# Altium PCB Bottom+Board_V1.pcbdoc
Units mm, origin at the board's own origin, x right, y up, seen from the top; angles counter-clockwise.
Board outline 91.9 x 71.4 mm, 2 copper layers (Top Layer, Bottom Layer); 9 components, 12 nets, 44 pads, 0 vias.
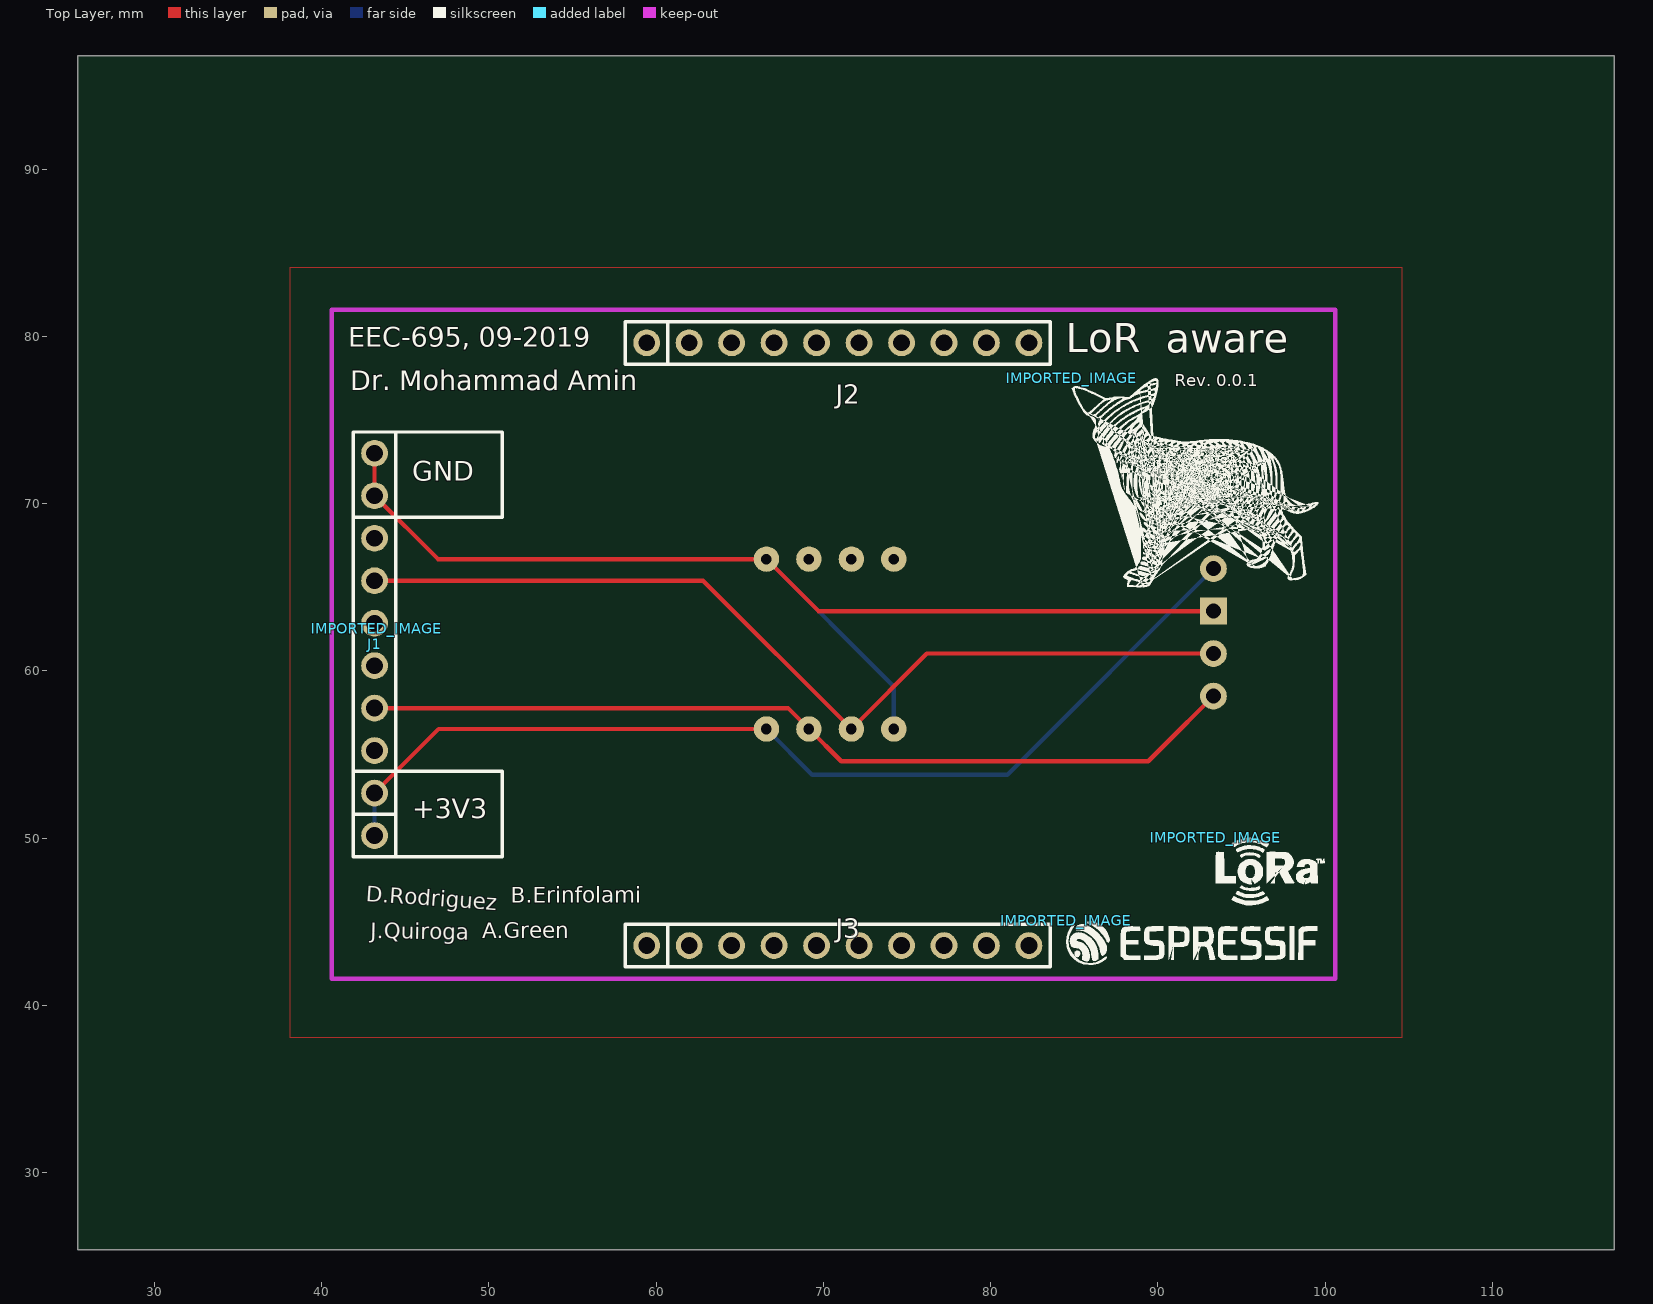
[diagram p0: Top Layer view]
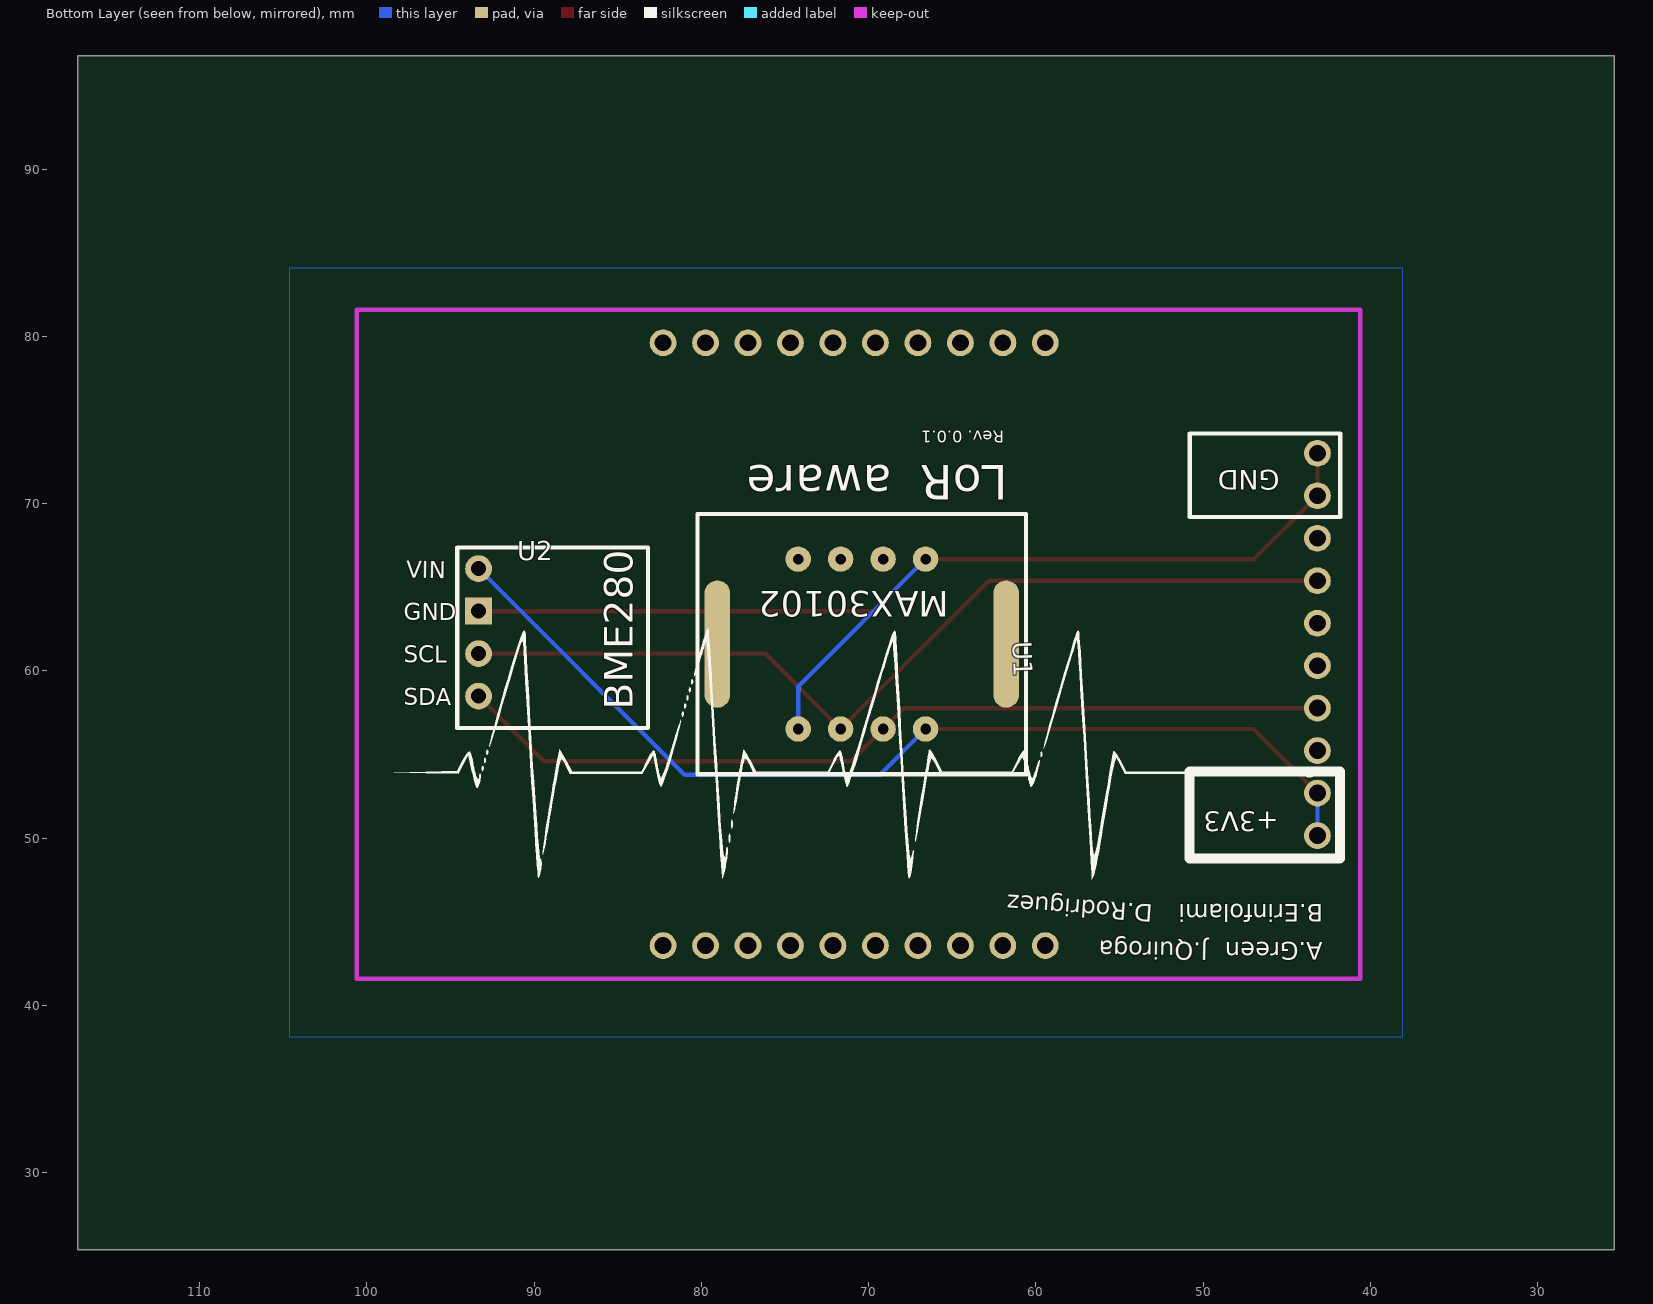
[diagram p1: Bottom Layer view, seen from below]

## Layer stack, top to bottom
Top Layer: signal copper (thickness not stored)
Dielectric: dielectric 0.32, FR-4, Dk 4.8
Bottom Layer: signal copper (thickness not stored)

## Board outline
117.3,25.4 25.4,25.4 25.4,96.8 117.3,96.8

## Components (designator, comment, footprint, x,y, rotation, side; value= is the part's Value field where it differs from the comment)
IMPORTED_IMAGE "IMPORTED_IMAGE" IMPORTED_IMAGE 43.297,62.527 r0 top
IMPORTED_IMAGE "IMPORTED_IMAGE" IMPORTED_IMAGE 84.86,77.503 r0 top
IMPORTED_IMAGE "IMPORTED_IMAGE" IMPORTED_IMAGE 84.515,45.051 r0 top
IMPORTED_IMAGE "IMPORTED_IMAGE" IMPORTED_IMAGE 93.468,50.019 r0 top
J1 "Header-Female-2.54_1x10" HDR-TH_10PIN-V-FEMALE-PITCH2.54 43.16,61.59 r90 top
J2 "Header-Female-2.54_1x10" HDR-TH_10PIN-V-FEMALE-PITCH2.54 70.86,79.62 r0 top
J3 "Header-Female-2.54_1x10" HDR-TH_10PIN-V-FEMALE-PITCH2.54 70.86,43.58 r0 top
U1 "MAX30102BREAKOUT" "MAX30102PCB COPY" 60.592,69.39 r90 bottom
U2 "BME280" BME280 94.592,67.39 r0 bottom

## Footprints (in the part's own frame and the unit in brackets; to place one, negate y for a bottom-side part, rotate by r counter-clockwise, add the part's x,y. Pads: shape width x height; smd on the part's side, far side on the other; paste and mask are expansions set on the pad)
BME280 [mm]
  round 1.6 hole 0.9: 1(-1.27,1.27) 3(-1.27,6.35) 4(-1.27,8.89)
  rect 1.6x1.6 hole 0.9: 2(-1.27,3.81)
  silkscreen extent -11.4,0 0,10.8
HDR-TH_10PIN-V-FEMALE-PITCH2.54 [mm]
  round 1.6 hole 1: 1(-11.43,0) 2(-8.89,0) 3(-6.35,0) 4(-3.81,0) 5(-1.27,0) 6(1.27,0) 7(3.81,0) 8(6.35,0) 9(8.89,0) 10(11.43,0)
  silkscreen extent -12.7,-1.27 12.7,1.27
IMPORTED_IMAGE [mm]
"MAX30102PCB COPY" [mil]
  round 60 hole 25: 1(-106.3,236.21) 2(-106.3,336.21) 3(-106.3,436.21) 4(-106.3,536.21) 5(-506.3,536.21) 6(-506.3,436.21) 7(-506.3,336.21) 8(-506.3,236.21)
  oval 300x60 smd: ""(-306.3,46.45) ""(-306.3,726.38)
  silkscreen extent -613,0 0,773

## Nets (pads, with @x,y where several pads share a name; then routed paths per layer and width w, separated by ;. In a path a pad name is that pad's centre, name@x,y a point inside that pad or via, vN(x,y) a via of type N, cw(c..) or ccw(c..) an arc to the next point about the centre after c; other vN are vias at no path point)
GND: J1.9 J1.10 U1.1 U1.5 U2.2 | length 68.9
  Top Layer w0.26: J1.10 J1.9 46.95,66.69 U1.1 69.703,63.581 U2.2
  Bottom Layer w0.26: U1.1 74.212,59.07 U1.5
S$37: 
S$320: 
S$1058: 
S$1060: 
S$1126: 
S$1129: 
S$1132: 
S$1134: 
SCL: J1.7 U1.6 U2.3 | length 55.7
  Top Layer w0.26: J1.7 62.802,65.4 U1.6 76.183,61.041 U2.3
SDA: J1.4 U1.7 U2.4 | length 53.1
  Top Layer w0.26: J1.4 67.882,57.78 U1.7 71.062,54.6 89.421,54.6 90.295,55.474 U2.4
VCC: J1.1 J1.2 U1.8 U2.1 | length 60.5
  Top Layer w0.26: J1.2 46.991,56.53 U1.8
  Bottom Layer w0.26: J1.1 J1.2 ; U1.8 69.322,53.8 81.001,53.8 U2.1
pads on no net: J1.3 J1.5 J1.6 J1.8 J2.1 J2.2 J2.3 J2.4 J2.5 J2.6 J2.7 J2.8 J2.9 J2.10 J3.1 J3.2 J3.3 J3.4 J3.5 J3.6 J3.7 J3.8 J3.9 J3.10 U1. U1.2 U1.3 U1.4

## Polygon pours and split planes (outlines as drawn)
GND on Bottom Layer (solid): 38.1,84.1 38.1,38.1 104.6,38.1 104.6,84.1 38.1,84.1
GND on Top Layer (solid): 38.1,84.1 38.1,38.1 104.6,38.1 104.6,84.1 38.1,84.1

## Silkscreen, mask and mechanical layers (free items; w line width, h text height)
Top Overlay:
  lines w0.203 net S$1126: 41.89,48.89 50.8,48.89 50.8,54 41.89,54
  lines w0.203 net S$1129: 41.89,69.2 50.8,69.2 50.8,74.29 41.89,74.29
  text "EEC-695, 09-2019" at 41.6,79 h2
  text "LoR" at 84.5,78.46 h3
  text "aware" at 90.46,78.44 h3
  text "Rev. 0.0.1" at 91,76.8 h1.25
  text "Dr. Mohammad Amin" at 41.7,76.4 h2
  text "GND" at 45.4,71 h2.03
  text "+3V3" at 45.4,50.8 h2.03
  text "D.Rodriguez" at 42.6,45.9 h1.6 r356
  text "B.Erinfolami" at 51.3,45.8 h1.6
  text "J.Quiroga" at 42.9,43.7 h1.6 r359
  text "A.Green" at 49.6,43.7 h1.6
Bottom Overlay:
  lines w0.254 net S$1132: 41.8,69.2 50.8,69.2 50.8,74.2 41.8,74.2 41.8,69.2
  lines w0.6 net S$1134: 41.8,48.8 41.8,54 50.8,54 50.8,48.8 41.8,48.8
  text "Rev. 0.0.1" at 61.88,74.6 h1.25 r180
  text "LoR" at 61.664,73.002 h3.5 r180
  text "aware" at 68.6,73 h3.5 r180
  text "GND" at 45.4,72.4 h2.03 r180
  text "+3V3" at 45.477,51.974 h2.03 r180
  text "B.Erinfolami" at 42.8,46.4 h1.8 r180
  text "D.Rodriguez" at 52.959,46.375 h1.8 r184
  text "A.Green" at 42.841,44.125 h1.8 r180
  text "J.Quiroga" at 49.7,44.1 h1.8 r181
Document:
  lines w0.254 net S$1058: 43.929,41.6 43.929,81.6 40.6,81.6 ; 58.66,41.6 58.66,81.6 40.6,81.6 ; 100.6,73.54 40.6,73.54 40.6,81.6 ; 100.6,78.85 40.6,78.85 40.6,81.6
  lines w0.254 net S$1060: 100.6,44.35 40.6,44.35 40.6,41.6 40.6,49.66 100.6,49.66

## Text inside footprints (layer, text, board x,y; h text height)
U1: Bottom Overlay "MAX30102" at 65.2,64.762 h1.52 r180
U2: Bottom Overlay "SDA" at 97.793,57.94 h1; Bottom Overlay "SCL" at 97.793,60.49 h1; Bottom Overlay "GND" at 97.793,63.04 h1; Bottom Overlay "VIN" at 97.638,65.582 h1 r1